# Altium PCB CAN Logger 3e HP3651 PCB.PcbDoc (part 2 of 3)
Units mm, origin at the board's own origin, x right, y up, seen from the top; angles counter-clockwise.
Board outline 56.62 x 82.65 mm, 4 copper layers (Component Side, Signal Layer 2, Signal Layer 1, Solder Side), stack 0.844 mm thick; 116 components, 130 nets, 582 pads, 374 vias.
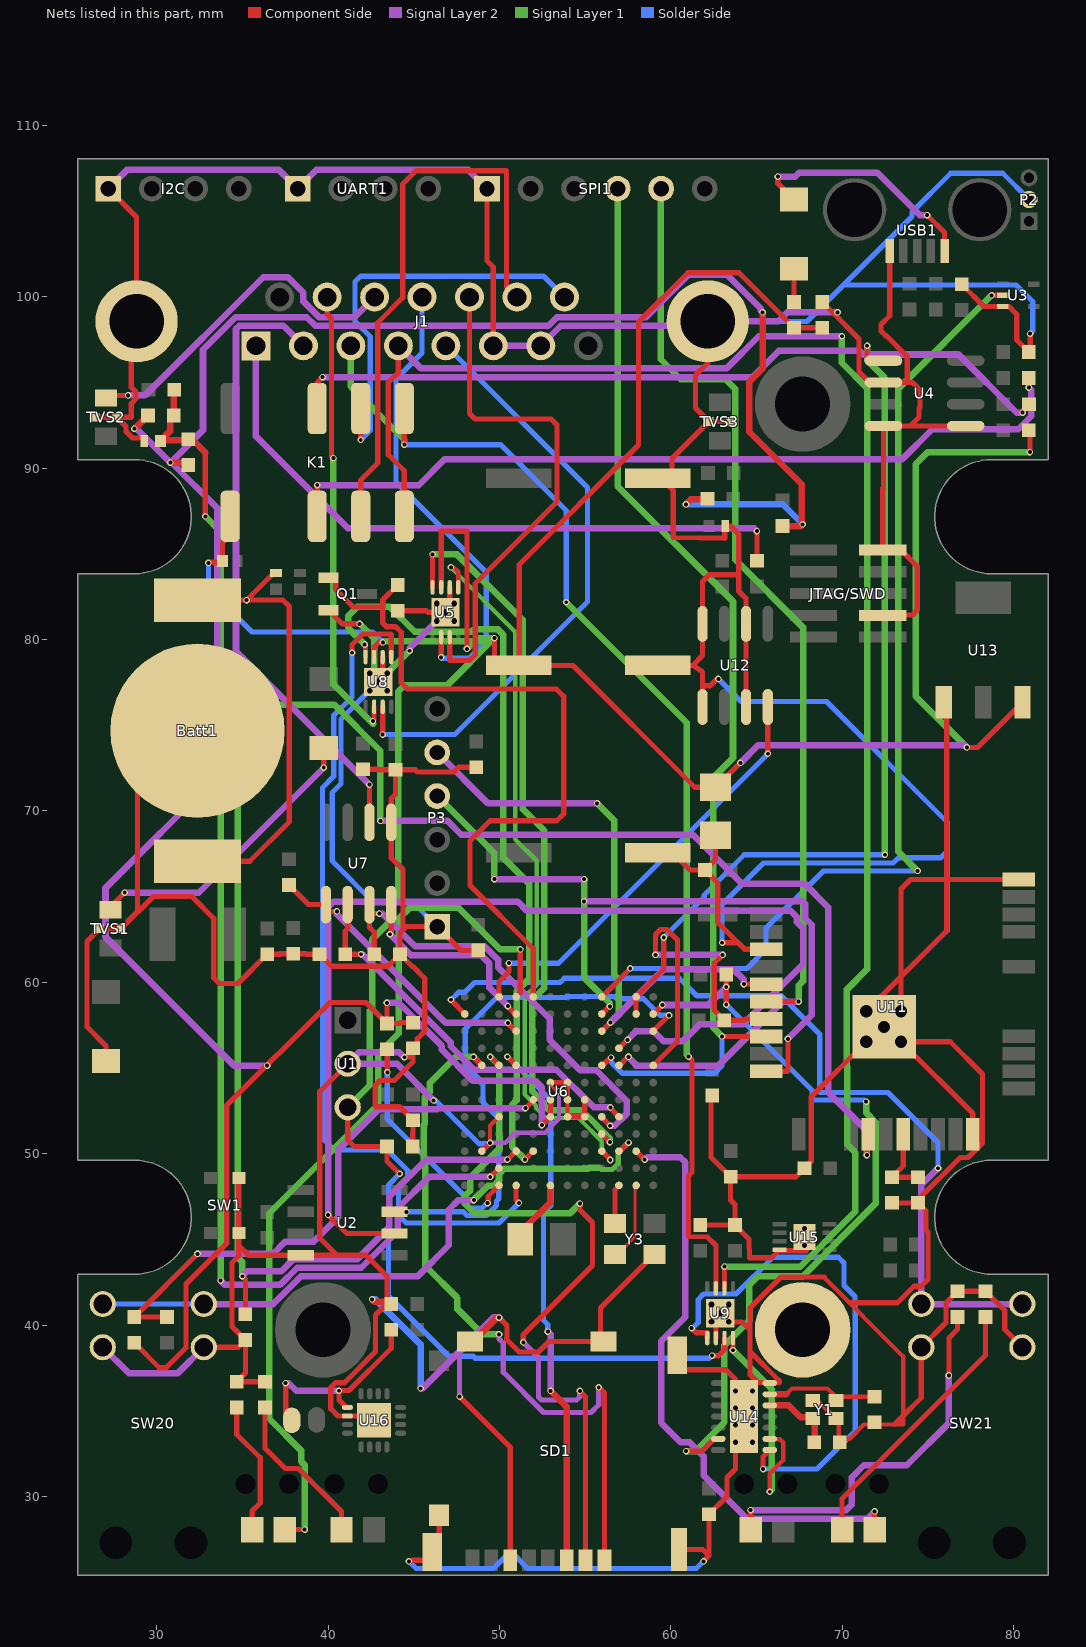
[diagram p4: the nets of this part, all layers, seen from the top]

## Via types
v1: diameter 0.381, hole 0.229, Component Side to Solder Side, 292 vias
v2: diameter 0.508, hole 0.254, Component Side to Solder Side, 66 vias
v3: diameter 0.508, hole 0.33, Component Side to Solder Side, 12 vias
v4: diameter 1.27, hole 0.711, Component Side to Solder Side, 4 vias

## Nets (pads, with @x,y where several pads share a name; then routed paths per layer and width w, separated by ;. In a path a pad name is that pad's centre, name@x,y a point inside that pad or via, vN(x,y) a via of type N, cw(c..) or ccw(c..) an arc to the next point about the centre after c; other vN are vias at no path point) (continued)
5V0: C2.1 C4.1 C6.2 C12.2 D11.2 K1.7 L6.2 R4.1 U1.3 U5.3 U8.3 U9.3 U13.3 | length 205.5
  Component Side w0.305: v1(33.025,84.464) 33.066,84.506 33.772,84.506 D11.2@33.848,84.582 33.848,85.649 34.29,86.091 K1.7@34.29,87.182 ; U1.3@41.148,52.705 41.148,50.8 41.529,50.419 C4.1@43.446,50.419 43.446,49.561 v1(44.18,48.828) ; U8.3@42.688,78.973 42.688,79.543 42.977,79.832 v1(43.205,79.832) ; U5.3@46.601,83.037 46.601,86.316 48.108,86.316 v1(48.108,79.451) ; v1(49.708,80.073) 49.708,78.816 50.038,78.486 C2.1@51.134,78.486 C2.1@51.156,78.486 ; v1(62.408,38.214) 62.784,38.214 63.127,38.557 U9.3@63.127,39.243 ; v1(64.057,72.796) 64.027,72.796 C12.2@62.611,71.38 61.392,71.38 54.286,78.486 C2.1@51.156,78.486 ; C6.2@68.834,98.183 L6.2@67.183,98.183 63.969,101.397 60.985,101.397 58.115,98.527 58.115,91.338 51.156,84.379 C2.1@51.156,78.486 ; v1(77.275,73.698) 77.889,73.698 U13.3@80.518,76.327 ; R4.1@80.887,92.202 80.95,92.139 v1(80.95,90.932)
  Signal Layer 2 w0.381: v1(64.057,72.796) 65.098,73.838 77.135,73.838 v1(77.275,73.698)
  Signal Layer 1 w0.381: U1.3@41.148,52.705 42.43,53.987 42.43,58.323 42.57,58.464 42.57,62.491 43.617,63.537 43.617,64.521 44.094,64.999 44.094,76.962 44.45,77.318 46.939,77.318 49.695,80.073 v1(49.708,80.073) ; v1(43.205,79.832) 43.276,79.903 49.537,79.903 v1(49.708,80.073) ; v1(48.108,79.451) 48.73,80.073 v1(49.708,80.073) ; v1(77.275,73.698) 74.295,76.678 74.295,90.233 74.993,90.932 v1(80.95,90.932)
  Solder Side w0.305: v1(33.025,84.464) 33.025,82.977 35.56,80.441 42.597,80.441 v1(43.205,79.832) ; v1(44.18,48.828) 43.523,48.171 43.523,41.704 47.051,38.176 48.48,38.176 48.594,38.062 62.255,38.062 v1(62.408,38.214)
A6: J1.1 R18.1 | length 38.5
  Component Side w0.305: R18.1@65.024,84.583 v1(65.024,86.316)
  Signal Layer 2 w0.381: J1.1@35.794,97.132 35.794,91.859 41.166,86.487 64.853,86.487 v1(65.024,86.316)
A6_Sense: U6.A3 U12.8 | length 25.1
  Component Side w0.305: U6.A3@49.975,59.149 49.975,60.033 50.553,60.612 v1(50.553,61.112) ; v1(65.659,73.33) U12.8@65.659,76.061
  Solder Side w0.305: v1(50.553,61.112) 53.442,61.112 v1(65.659,73.33)
A7: J1.11 TVS2.1 | length 20.3
  Component Side w0.305: TVS2.1@27.051,94.234 v1(28.334,94.234)
  Signal Layer 2 w0.381: v1(28.334,94.234) 29.32,94.234 36.221,101.135 37.661,101.135 38.564,100.231 38.564,99.713 39.467,98.81 41.556,98.81 J1.11@42.719,99.972
A7_Measured: C17.2 D9.2 R15.2 R24.1 U6.L3 | length 75.2
  Component Side w0.305: R24.1@30.999,92.837 R24.1@30.999,93.064 ; v1(32.842,87.182) 32.842,90.907 ; v1(49.467,48.641) U6.L3@49.975,49.149
  Component Side w0.381: R24.1@30.998,93.066 30.788,92.856 30.788,92.153 30.227,91.592 D9.2@30.227,91.567 30.285,91.624 31.781,91.624 C17.2@31.839,91.682 31.878,91.643 32.106,91.643 32.842,90.907 ; R24.1@30.999,93.064 31.012,93.076 31.012,94.55 R15.2@31.027,94.564
  Signal Layer 2 w0.381: v1(33.731,42.596) 33.985,42.342 37.198,42.342 38.201,43.345 41.937,43.345 44.069,45.477 44.069,46.819 45.891,48.641 v1(49.467,48.641)
  Signal Layer 1 w0.381: v1(32.842,87.182) 33.731,86.293 v1(33.731,42.596)
AGND: C17.1 C21.1 C23.1 C24.1 L5.2 R24.2 R28.2 U6.G6 U6.H6 | length 165.8
  Component Side w0.305: C21.1@28.702,38.976 28.702,38.971 30.158,37.515 30.548,37.515 31.712,38.679 31.712,42.393 34.087,44.767 34.087,52.807 40.107,58.826 42.21,58.826 C23.1@43.44,57.596 ; v1(43.434,58.801) 43.44,58.795 C23.1@43.44,57.596 ; L5.2@44.958,57.646 44.227,57.646 44.171,57.59 C23.1@43.446,57.59 C23.1@43.44,57.596 ; v1(52.476,51.664) 52.49,51.664 U6.H6@52.975,52.149 U6.G6@52.975,53.149
  Component Side w0.381: v1(28.702,92.304) 28.736,92.304 R24.2@29.498,93.066 ; v1(30.808,90.311) 31.709,90.311 C17.1@31.839,90.182 ; v1(60.884,87.884) 61.167,88.167 62.103,88.167 R28.2@62.139,88.202 ; v1(65.354,99.085) 65.354,95.79 64.579,95.015 64.579,92.113 67.64,89.052 v1@67.64,86.665 ; C24.1@66.517,86.614 67.589,86.614 v1@67.64,86.665 ; v1(67.691,86.716) v1@67.64,86.665
  Signal Layer 2 w0.381: v1(28.702,92.304) 28.816,92.304 v1(30.808,90.311) ; v1(36.449,55.14) 34.522,55.14 27.018,62.644 27.018,65.499 33.533,72.014 33.533,87.664 30.885,90.311 v1(30.808,90.311) ; v1(43.434,58.801) 44.122,58.801 46.647,56.275 46.647,56.056 48.436,54.267 52.07,54.267 52.476,53.861 v1(52.476,51.664) ; v1(65.354,99.085) 65.253,99.187 65.253,99.292 63.275,101.27 61.023,101.27 58.563,98.81 53.373,98.81 52.858,98.294 39.264,98.294 38.756,98.802 34.607,98.802 32.707,96.903 32.707,92.211 v1(30.808,90.311)
  Solder Side w0.381: v1(60.884,87.884) 66.523,87.884 v1(67.691,86.716)
AREF: C23.2 U6.M3 | length 13.7
  Component Side w0.305: C23.2@43.446,56.09 43.453,56.083 43.453,54.744 v1(43.46,54.737) ; v1(49.309,47.117) 49.345,47.153 49.345,47.519 U6.M3@49.975,48.149
  Solder Side w0.305: v1(43.46,54.737) 43.46,52.029 48.021,47.468 48.021,47.098 48.294,46.825 48.996,46.825 49.288,47.117 v1(49.309,47.117)
Blue: D6.1 U6.K11 | length 35.7
  Component Side w0.305: U6.K11@57.975,50.149 v1(58.471,49.653) ; D6.1@71.892,28.067 v1(71.892,29.134)
  Signal Layer 2 w0.381: v1(58.471,49.653) 58.611,49.793 60.551,49.793 60.848,49.496 60.848,40.482 59.436,39.07 59.436,34.29 60.573,33.153 61.105,33.153 61.912,32.346 61.912,31.237 64.448,28.702 71.46,28.702 v1(71.892,29.134)
BTTN1: SW21.1 SW21.3 U6.B1 | length 51.8
  Component Side w0.305: v1(47.168,58.979) 47.168,58.956 U6.B1@47.975,58.149
  Signal Layer 2 w0.381: v1(75.586,49.149) 74.612,48.175 SW21.1@74.612,41.224 SW21.3@80.505,41.224
  Solder Side w0.305: v1(47.168,58.979) 47.188,58.979 47.633,59.423 47.988,59.423 48.546,59.981 53.531,59.981 53.787,60.236 60.49,60.236 61.519,59.207 66.456,59.207 68.682,56.981 68.682,53.594 68.707,53.569 72.674,53.569 75.586,50.656 v1(75.586,49.149)
BTTN2: SW20.1 SW20.3 U6.K10 | length 37.1
  Component Side w0.305: U6.K10@56.955,50.074 U6.K10@56.975,50.094 ; U6.K10@56.975,50.149 U6.K10@56.975,50.094 ; v1(57.531,50.65) U6.K10@56.975,50.094
  Signal Layer 2 w0.381: SW20.3@32.753,41.224 36.798,41.224 38.411,42.837 45.225,42.837 47.041,44.653 47.041,46.728 47.608,47.295 v1(48.514,47.295)
  Signal Layer 1 w0.305: 55.975,49.083 56.58,49.083 56.934,49.437 56.934,50.053 v1(57.531,50.65)
  Signal Layer 1 w0.381: v1(48.514,47.295) 48.514,47.32 49.327,48.133 49.677,48.133 49.975,48.431 49.975,48.814 50.285,49.124 52.257,49.124 52.266,49.114 55.18,49.114 55.238,49.172 55.803,49.172
  Solder Side w0.305: SW20.1@26.86,41.224 SW20.3@32.753,41.224
CAN0H: J1.13 U5.7 | length 30.6
  Component Side w0.305: U5.7@47.101,80.137 47.101,78.791 47.126,78.765 48.26,78.765 48.59,79.096 48.59,83.261 53.365,88.036 53.365,92.519 53.023,92.862 48.578,92.862 48.259,93.181 J1.13@48.259,99.972
CAN0L: J1.12 U5.6 | length 27.1
  Component Side w0.305: v1(46.601,78.956) U5.6@46.601,80.137
  Solder Side w0.305: J1.12@45.489,99.972 45.489,96.721 43.967,95.199 43.967,89.179 49.238,83.909 49.238,79.917 48.226,78.905 46.652,78.905 v1(46.601,78.956)
CAN0RX: U5.4 U6.J9 | length 43.7
  Component Side w0.305: U5.4@46.101,83.037 v1(46.101,84.963) ; U6.J9@55.975,51.149 56.439,50.685 v1(56.439,50.673)
  Signal Layer 1 w0.381: v1(46.101,84.963) 47.53,84.963 51.359,81.134 51.359,70.104 52.616,68.847 52.616,59.664 51.918,58.965 51.918,53.644 52.578,52.984 52.578,52.843 52.894,52.527 54.8,52.527 56.439,50.889 v1(56.439,50.673)
CAN0TX: U5.1 U6.K9 | length 42.3
  Component Side w0.254: v1(47.168,84.201) 47.346,84.201 47.601,83.946 U5.1@47.601,83.037
  Component Side w0.305: U6.K9@55.975,50.149 56.464,49.66 v1(56.464,49.632)
  Signal Layer 1 w0.254: v1(47.168,84.201) 50.914,80.454 50.914,68.345 52.172,67.088 52.172,59.848 51.473,59.149 51.473,53.46 52.133,52.8 52.133,52.659 52.71,52.083 54.616,52.083 55.975,50.724 55.975,50.149 56.464,49.66 v1(56.464,49.632)
CAN1H: J1.5 U8.7 | length 35.2
  Component Side w0.305: v1(43.188,74.447) U8.7@43.188,76.073
  Solder Side w0.305: v1(43.188,74.447) 47.396,74.447 55.143,82.194 55.143,88.863 J1.5@46.874,97.132
CAN1L: J1.10 U8.6 | length 27
  Component Side w0.305: J1.10@39.949,99.972 39.949,98.984 40.208,98.725 40.208,90.678 v1(40.31,90.576) ; v1@42.616,75.226 42.688,75.298 U8.6@42.688,76.073
  Signal Layer 1 w0.381: v1(40.31,90.576) 40.31,77.397 v1@42.621,75.086 ; v1(42.621,75.235) v1@42.621,75.086 ; v1@42.631,75.076 v1@42.621,75.086
CAN1RX: U6.K5 U8.4 | length 45.5
  Component Side w0.305: v1(42.137,79.705) 42.188,79.654 U8.4@42.188,78.973 ; v1(51.486,49.657) 51.486,49.66 U6.K5@51.975,50.149
  Signal Layer 1 w0.381: v1(42.137,79.705) 41.173,80.669 41.173,81.358 41.71,81.895 43.607,81.895 45.057,80.444 48.382,80.444 48.519,80.581 49.918,80.581 50.216,80.284 50.216,67.272 51.727,65.761 51.727,60.195 51.003,59.471 51.003,53.119 50.749,52.865 50.749,50.394 v1(51.486,49.657)
CAN1SW: Q1.1 R14.2 U6.A5 | length 44.4
  Component Side w0.305: Q1.1@40.023,83.604 40.298,83.604 40.446,83.456 40.446,82.916 41.472,81.89 43.188,81.89 ; R14.2@44.069,83.173 43.188,82.292 43.188,81.89 ; U6.A5@51.975,59.149 51.975,61.959 48.285,65.648 48.285,68.25 49.454,69.418 53.34,69.418 53.746,69.825 53.746,76.683 53.315,77.114 44.628,77.114 44.272,77.47 44.272,80.416 43.942,80.747 43.404,80.747 43.188,80.962 43.188,81.89
CAN1TX: U6.M4 U8.1 | length 50.7
  Component Side w0.305: v1(41.402,79.223) 41.402,79.692 42.024,80.315 43.663,80.315 43.688,80.289 U8.1@43.688,78.973 ; U6.M4@50.975,48.149 50.975,47.309 51.134,47.15 v1(51.134,47.13)
  Solder Side w0.305: v1(41.402,79.223) 41.402,76.631 40.329,75.558 40.329,72.005 39.675,71.351 39.675,50.902 40.361,50.216 43.456,50.216 44.65,49.022 44.65,48.633 44.107,48.091 44.107,46.414 44.56,45.961 49.966,45.961 v1(51.134,47.13)
CAN2H: J1.3 K1.3 U9.7 | length 70
  Component Side w0.305: v1(44.45,91.364) K1.3@44.45,93.472 ; v1(61.036,55.664) 61.242,55.458 61.242,48.912 61.036,48.706 61.036,45.161 62.128,45.136 62.627,44.637 U9.7@62.627,42.143
  Signal Layer 1 w0.381: J1.3@41.334,97.132 41.334,94.759 44.45,91.643 v1(44.45,91.364) ; v1(53.899,82.169) 60.935,75.133 60.935,55.766 v1(61.036,55.664)
  Solder Side w0.305: v1(44.45,91.364) 50.063,91.364 53.899,87.528 v1(53.899,82.169)
CAN2H/J1708+: J1.15 K1.1 | length 24.5
  Component Side w0.305: v1(41.91,91.643) K1.1@41.91,93.472
  Solder Side w0.305: v1(41.91,91.643) 42.469,92.202 42.469,97.663 41.58,98.552 41.58,100.863 41.91,101.194 52.577,101.194 J1.15@53.799,99.972
CAN2L: J1.4 K1.6 U9.6 | length 100.4
  Component Side w0.305: J1.4@44.104,97.132 44.104,95.58 43.51,94.986 43.51,90.78 44.45,89.84 K1.6@44.45,87.182 ; U9.6@63.127,42.143 v1(63.127,43.409)
  Signal Layer 2 w0.381: J1.4@44.104,97.132 45.402,95.834 63.274,95.834 65.129,97.688 v1(69.977,97.688)
  Signal Layer 1 w0.381: v1(63.127,43.409) 67.549,43.409 70.764,46.624 70.764,50.063 70.282,50.546 70.282,55.056 70.271,55.067 70.271,59.578 71.45,60.757 71.45,94.671 69.977,96.144 v1(69.977,97.688)
CAN2L/J1708-: J1.14 K1.4 | length 34.4
  Component Side w0.305: K1.4@41.91,87.182 41.91,89.306 42.901,90.297 42.901,98.476 44.365,99.94 44.365,106.569 45.136,107.34 50.394,107.34 50.419,107.315 50.419,100.582 J1.14@51.029,99.972
CAN2RX: U9.4 U14.2 | length 14
  Component Side w0.254: v1(65.77,30.277) 65.77,31.331 66.548,32.109 66.548,33.163 66.366,33.345 65.788,33.345 U14.2@65.77,33.363
  Component Side w0.305: v1(63.627,38.532) U9.4@63.627,39.243
  Signal Layer 1 w0.381: v1(63.627,38.532) 65.889,36.27 65.889,30.396 v1(65.77,30.277)
CAN2TX: U9.1 U14.1 | length 30.5
  Component Side w0.305: v1(61.214,39.827) 61.493,39.548 62.127,39.548 U9.1@62.127,39.243 ; v1(65.381,31.599) 65.38,31.6 65.38,32.323 U14.1@65.77,32.713
  Solder Side w0.305: v1(61.214,39.827) 61.277,39.827 61.595,40.145 61.595,41.491 61.912,41.808 63.805,41.808 65.951,43.955 69.765,43.955 70.104,43.616 70.104,42.316 70.748,41.672 70.748,41.015 70.764,40.999 70.764,33.833 68.531,31.599 v1(65.381,31.599)
CHIP_EN: R17.1 U6.K4 U11.22 | length 113.9
  Component Side w0.305: v1(35.001,42.85) 35.179,42.672 R17.1@35.179,40.628 ; v1(50.47,49.657) 50.483,49.657 U6.K4@50.975,50.149 ; v1(71.439,49.911) 71.439,51.045 U11.22@71.522,51.128
  Signal Layer 2 w0.381: v1(35.001,42.85) 35.294,43.143 37.28,43.143 37.991,43.853 41.727,43.853 43.561,45.687 43.561,47.491 45.727,49.657 v1(50.47,49.657) ; v1(43.053,69.418) 46.965,69.418 47.777,68.605 61.29,68.605 64.135,65.761 67.793,65.761 69.19,64.364 69.19,53.571 71.439,51.321 v1(71.439,49.911)
  Signal Layer 1 w0.381: v1(35.001,42.85) 35.001,43.688 34.747,43.942 34.747,75.73 35.217,76.2 40.361,76.2 43.053,73.508 v1(43.053,69.418)
CMD: SD1.3 U6.E4 | length 31.9
  Component Side w0.305: v1(50.47,55.654) U6.E4@50.975,55.149 ; v1@52.817,39.609 v1(52.832,39.624)
  Component Side w0.381: v1(52.984,36.163) 53.926,35.222 SD1.3@53.926,26.284
  Signal Layer 2 w0.381: v1(52.832,39.624) 52.984,39.472 v1(52.984,36.163)
  Solder Side w0.305: v1(50.47,55.654) 52.997,53.127 52.997,46.964 52.578,46.545 52.578,40.28 52.817,40.04 52.817,39.639 v1(52.832,39.624)
CS1: R33.1 U6.E12 U11.16 | length 21.4
  Component Side w0.305: U6.E12@58.975,55.149 60.389,56.562 60.389,62.475 59.783,63.081 59.394,63.081 59.106,62.793 v1(59.106,61.595) ; v1(63.017,61.595) 62.535,61.112 62.535,58.373 R33.1@63.123,57.785 64.287,57.785 64.358,57.856 U11.16@65.558,57.856
  Signal Layer 2 w0.381: v1(59.106,61.595) v1(63.017,61.595)
CS_CAN: R32.1 U6.B12 U14.13 | length 46.7
  Component Side w0.305: U6.B12@58.975,58.149 58.981,58.149 59.506,58.674 v1(59.512,58.674) ; v1(60.895,32.645) 61.81,32.645 62.527,33.363 U14.13@62.77,33.363 ; v1(63.234,58.699) v1(63.234,59.735) R32.1@63.234,60.452
  Signal Layer 2 w0.381: v1(59.512,58.674) 62.173,58.674 v1(63.234,59.735)
  Signal Layer 1 w0.381: v1(60.895,32.645) 61.445,32.645 63.119,34.319 63.119,38.811 64.567,40.259 64.567,42.329 65.087,42.85 67.708,42.85 71.947,47.089 71.947,51.834 71.387,52.394 v1(71.387,53.039)
  Solder Side w0.305: v1(63.234,58.699) 68.25,53.684 68.25,53.162 68.275,53.137 71.289,53.137 v1(71.387,53.039)
D25: 
DATA2: SD1.1 U6.E2 | length 41.3
  Component Side w0.305: v1(55.795,36.364) 55.802,36.364 56.126,36.04 SD1.1@56.126,26.284
  Component Side w0.381: v1(48.489,55.651) 48.975,55.165 U6.E2@48.975,55.149
  Signal Layer 2 w0.305: v1(49.975,39.458) 49.975,39.19 50.223,38.942 50.223,37.254 52.57,34.907 55.349,34.907 55.795,35.353 v1(55.795,36.364)
  Signal Layer 1 w0.381: v1(48.489,55.651) 47.47,55.651 45.923,54.104 45.923,53.592 45.652,53.32 45.652,51.745 45.58,51.673 45.58,49.475 45.669,49.386 45.669,43.457 47.549,41.577 47.549,40.935 49.026,39.458 v1(49.975,39.458)
DATA3: SD1.2 U6.E3 | length 44.1
  Component Side w0.305: v1(49.467,55.651) 49.473,55.651 U6.E3@49.975,55.149 ; v1(51.395,38.986) 51.395,39.445 55.423,43.472 55.423,45.987 54.695,46.715 v1(54.695,47.092) ; v1(54.695,36.163) 54.695,36.142 55.026,35.812 SD1.2@55.026,26.284
  Signal Layer 2 w0.305: v1(51.395,38.986) 52.28,38.1 52.28,35.808 52.459,35.629 54.507,35.629 54.681,35.803 54.681,36.148 v1(54.695,36.163)
  Signal Layer 1 w0.381: v1(49.467,55.651) 49.987,55.131 49.987,50.977 50.004,50.96 50.004,50.309 48.285,48.59 48.285,47.835 47.981,47.531 47.981,47.084 48.528,46.537 54.14,46.537 v1(54.695,47.092)
"Debug RX": P3.4 U6.B9 U11.19 | length 44.9
  Component Side w0.305: U6.B9@55.975,58.149 56.424,58.598 v1(56.445,58.598) ; U11.19@65.558,54.808 66.802,54.808 66.827,54.833 v1(66.827,56.693)
  Signal Layer 2 w0.381: v1(49.708,66.015) v1(54.94,66.015) ; v1(54.94,64.719) 67.691,64.719 67.843,64.567 67.843,63.735 68.22,63.358 68.22,58.085 v1(66.827,56.693)
  Signal Layer 1 w0.381: P3.4@46.367,70.866 49.708,67.525 v1(49.708,66.015) ; v1(54.94,66.015) v1(54.94,64.719) 54.94,60.274 56.445,58.77 v1(56.445,58.598)
"Debug TX": P3.5 U6.C9 U11.14 | length 35.7
  Component Side w0.305: U6.C9@55.975,57.149 v1(56.475,57.649) ; v1(64.262,59.893) 65.553,59.893 U11.14@65.558,59.888
  Signal Layer 2 w0.381: P3.5@46.367,73.406 49.339,70.434 v1(55.702,70.434) ; v1(56.475,57.649) 59.577,60.751 63.655,60.751 64.262,60.143 v1(64.262,59.893)
  Signal Layer 1 w0.381: v1(55.702,70.434) 56.694,69.443 56.694,60.418 56.972,60.14 56.972,58.146 v1(56.475,57.649)
EOSC16: U6.M11 Y3.1 | length 4.5
  Component Side w0.178: Y3.1@56.955,44.196 57.922,45.163 57.922,48.202 U6.M11@57.975,48.149
EXTAL32: U6.M6 X1.2 | length 4.1
  Component Side w0.381: X1.2@50.713,44.577 50.91,44.774 X1.2@51.208,44.774 ; X1.2@51.134,45.499 51.304,45.499 52.975,47.17 U6.M6@52.975,48.149
GND: Batt1.2 C1.1 C2.2 C3.2 C4.2 C5.1 C6.1 C7.1 C8.1 C9.1 C10.2 C11.1 C12.1 C13.1 C14.1 C15.1 C16.1 C18.1 C19.1 C20.1 C22.1 C25.1 C28.2 D9.1 D10.1 I2C.1 J1.6 J1.7 J1.16 J1.17 JTAG/SWD.3 JTAG/SWD.9 L5.1 P2.2 P3.1 pad.0@67.691,39.726 Q1.2 R2.2 R3.2 R7.2 R8.2 R9.2 R11.2 R12.2 R13.2 R14.1 R17.2 R19.2 R23.2 R27.2 SD1.6 SD1.P1 SD1.P2 SD1.P3 SD1.P4 SD1.P5 SD1.SW SPI1.1 SW1.3 SW1.4 SW20.2 SW20.4 SW21.2 SW21.4 TVS1.3 TVS2.3 TVS3.3 U1.2 U2.8 U3.3 U4.2 U4.4 U4.5 U5.0 U5.2 U6.F6 U6.F7 U6.G7 U6.G8 U6.H3 U6.H7 U6.H8 U6.K2 U6.M10 U7.5 U8.0 U8.2 U9.0 U9.2 U11.9 U11.12 U11.28 U11.29 U12.2 U12.4 U12.5 U12.7 U13.1 U14. U14.7 U15.4 U15.9 U15.9_1 U15.9_2 U16.2 U16.17 UART1.1 USB1.4 Y1.2 Y1.4 Y3.2 Y3.4 Z1.1 | length 717.9
  Component Side w0.203: U6.F6@52.975,54.149 52.85,54.149 53.354,53.645 v1(53.474,53.645)
  Component Side w0.254: v1(49.454,50.628) 49.454,51.628 U6.H3@49.975,52.149 ; U6.H7@53.975,52.149 U6.G7@53.975,53.149 ; 56.744,47.918 U6.M10@56.975,48.149 ; SD1.P3@60.215,37.866 SD1.P3@60.215,38.521 ; 64.643,38.463 64.643,40.988 66.428,42.774 68.954,42.774 73.552,38.175 73.552,34.702 73.552,34.197 73.047,34.197 71.26,34.197 70.435,33.372 69.801,33.372 69.801,34.716 69.44,34.716 Y1.2@68.465,35.691 ; 66.322,36.613 66.322,36.652 ; 66.322,36.748 66.322,36.784
  Component Side w0.305: TVS2.3@26.416,92.964 TVS2.3@27.686,92.964 ; Z1.1@27.051,55.397 27.051,56.286 25.933,57.404 25.933,62.382 TVS1.3@26.67,63.119 TVS1.3@27.94,63.119 29.82,64.999 32.067,64.999 33.337,63.729 33.337,60.251 33.655,59.934 34.752,59.934 C10.2@36.449,61.631 37.186,61.631 37.215,61.66 C1.1@37.973,61.66 38.71,61.66 38.733,61.636 R9.2@39.509,61.636 40.21,60.935 43.5,60.935 R8.2@44.196,61.63 ; I2C.1@27.178,106.299 28.829,104.648 J1.16@28.829,98.552 28.524,98.247 28.524,94.704 28.528,94.704 28.804,94.429 28.804,94.039 28.528,93.764 28.524,93.764 28.524,92.964 TVS2.3@27.686,92.964 ; 28.346,63.602 28.88,64.135 28.88,71.171 Batt1.2@32.385,74.676 ; D9.1@29.277,91.567 29.277,91.674 29.205,91.746 28.595,91.746 28.219,92.122 28.219,92.431 TVS2.3@27.686,92.964 ; SW20.4@32.753,38.71 34.761,38.71 R17.2@35.179,39.128 ; SW1.4@34.797,48.26 SW1.3@34.797,45.381 34.797,44.653 ; R3.2@36.322,36.691 R2.2@34.671,36.691 35.179,37.199 R17.2@35.179,39.128 ; Q1.2@40.023,81.704 40.816,80.911 v1(41.846,80.911) ; U1.2@41.148,55.245 39.522,53.619 39.522,45.085 40.538,44.069 ; C16.1@42.037,72.431 42.951,72.431 42.981,72.402 R12.2@43.942,72.402 ; U16.17@42.684,34.443 42.033,34.443 41.783,34.693 U16.2@41.134,34.693 40.589,34.693 40.166,35.116 40.166,36.364 40.441,36.639 40.961,36.639 42.774,38.453 42.774,40.589 C25.1@43.459,41.275 ; U8.2@43.188,78.973 43.188,78.289 v3(43.446,78.031) ; C25.1@43.459,41.072 C25.1@43.459,41.275 ; R14.1@44.069,81.673 45.749,81.673 45.835,81.587 U5.0@46.851,81.587 ; v1(44.45,55.626) 44.465,55.641 44.858,55.641 44.958,55.74 ; v1(44.721,26.213) 44.735,26.227 44.875,26.227 44.931,26.284 45.658,26.284 46.081,26.707 SD1.P2@46.081,26.764 46.486,27.169 SD1.SW@46.486,28.914 ; C4.2@44.946,50.419 44.946,51.181 44.958,51.193 C20.1@44.958,51.955 44.171,52.742 42.799,52.742 42.762,52.78 42.762,53.988 43.04,54.267 43.866,54.267 44.958,55.359 44.958,55.74 ; U5.2@47.101,83.037 47.101,82.353 v3(47.359,82.095) ; v1(47.676,35.832) 50.626,32.882 SD1.6@50.626,26.284 ; R11.2@48.641,72.541 47.624,72.541 47.346,72.263 45.224,72.263 45.085,72.402 R12.2@43.942,72.402 ; C13.1@48.768,61.861 47.752,61.861 P3.1@46.367,63.246 44.577,63.246 44.374,63.043 ; U6.K2@48.975,50.149 v1(49.454,50.628) ; SPI1.1@49.276,106.299 49.276,102.095 49.644,101.727 J1.6@49.644,97.132 ; v1(49.975,40.438) 50.445,39.968 50.445,39.263 50.434,39.252 50.434,39.145 51.152,38.427 52.273,38.427 52.886,39.039 SD1.P4@56.066,39.039 55.891,39.214 55.891,40.997 Y3.2@58.579,43.685 ; U6.F6@52.975,54.149 U6.F7@53.975,54.149 U6.G7@53.975,53.149 ; U6.H7@53.975,52.149 U6.H8@54.975,52.149 U6.G8@54.975,53.149 ; Y3.4@56.744,45.92 56.744,47.918 ; C28.2@59.234,67.564 60.096,67.564 61.112,66.548 R27.2@61.988,66.548 ; C2.2@59.234,78.486 61.277,78.486 ; C3.2@59.234,89.408 C3.2@59.436,89.408 ; 60.147,88.622 60.147,85.952 63.143,85.903 D10.1@63.168,86.614 63.5,86.614 63.957,86.157 63.957,83.769 ; 60.147,88.697 60.071,88.773 ; SD1.P3@60.215,38.521 SD1.P3@60.34,38.647 ; SD1.P3@60.325,37.4 63.2,37.4 63.77,36.83 U14.@63.77,36.163 ; SD1.P1@60.471,26.914 61.864,26.914 62.23,26.548 ; SD1.P3@60.604,38.911 SD1.P3@60.348,38.654 ; C3.2@60.858,89.408 C3.2@60.071,89.408 ; R13.2@61.722,45.835 62.627,45.835 C9.1@63.738,45.835 ; U12.5@61.849,76.061 61.849,77.267 ; v1(61.912,26.213) 61.912,26.231 62.23,26.548 ; J1.17@62.149,98.552 62.149,96.134 61.443,95.428 61.443,93.497 TVS3.3@62.23,92.71 ; U9.0@62.252,40.302 v3(62.369,40.185) 62.627,39.927 U9.2@62.627,39.243 ; 62.281,77.318 61.849,77.292 ; C7.1@62.423,53.399 62.351,53.327 62.351,49.79 C22.1@63.488,48.653 ; C12.1@62.611,68.58 62.611,67.171 R27.2@61.988,66.548 ; v1(62.778,77.699) 62.69,77.699 62.282,77.291 61.849,77.267 ; v1(62.992,62.306) 63.927,62.306 ; v3(63.385,40.185) 64.158,40.185 64.618,39.726 ; TVS3.3@63.5,92.71 TVS3.3@62.23,92.71 ; U14.@63.77,33.163 63.77,31.598 63.271,31.099 63.271,30.009 C8.1@62.23,28.968 62.23,26.548 ; U14.@63.77,35.163 63.754,35.163 64.254,34.663 U14.@64.27,34.663 ; U12.7@64.389,76.061 U12.2@64.389,80.911 64.389,82.398 63.957,82.829 63.957,83.769 ; 66.322,36.652 65.087,36.652 64.618,37.122 64.618,38.453 ; 66.322,36.748 64.618,38.453 ; 67.903,44.335 66.297,44.335 65.892,43.93 64.592,43.93 64.567,45.006 C9.1@63.738,45.835 ; C6.1@68.834,99.683 69.432,99.085 ; 68.964,42.799 66.418,42.799 64.618,40.999 64.618,39.726 ; v1(69.723,99.085) 69.432,99.085 ; 70.463,41.3 73.216,41.3 74.181,42.266 74.612,42.266 75.006,42.659 75.006,45.415 74.879,45.542 74.879,46.672 C11.1@74.422,47.129 ; v4(71.399,58.305) 73.431,60.337 ; JTAG/SWD.3@72.366,81.407 72.391,81.432 74.092,81.432 74.371,81.712 74.371,84.267 73.421,85.217 JTAG/SWD.9@72.366,85.217 72.366,88.798 72.403,88.835 U4.4@72.403,92.456 73.977,92.456 ; USB1.4@72.771,102.667 72.771,98.886 72.263,98.378 72.263,97.988 72.538,97.713 72.59,97.713 73.787,96.516 73.787,95.021 73.762,94.996 ; C5.1@72.898,47.129 C11.1@74.422,47.129 ; 73.047,34.197 73.552,34.702 74.612,35.763 SW21.2@74.612,38.71 76.048,40.145 76.048,41.292 R19.2@76.729,41.974 R23.2@78.359,41.974 79.477,40.857 79.477,39.738 SW21.4@80.505,38.71 ; v4(73.431,58.305) 73.431,60.337 ; U13.1@75.918,76.327 75.918,75.844 76.098,75.844 76.098,65.99 ; C19.1@76.976,100.722 78.272,99.426 U3.3@79.364,99.426 79.72,99.426 80.175,98.971 80.175,97.486 R7.2@80.887,96.774 80.962,96.849 v1(80.962,97.839) ; U4.5@77.203,92.456 73.977,92.456 ; U11.28@77.618,51.128 77.618,52.34 v4(73.431,56.527) ; U11.9@80.288,65.99 76.098,65.99 ; 34.797,44.653 34.797,44.043 34.392,43.637 34.392,39.915 R17.2@35.179,39.128 ; 34.797,44.653 35.381,44.069 U2.8@38.408,44.069 40.538,44.069 ; 40.538,44.069 42.227,44.069 43.459,42.837 43.459,41.35 C25.1@43.459,41.275 ; R12.2@43.942,72.402 43.942,70.968 43.688,70.714 U7.5@43.688,69.329 43.688,67.259 44.374,66.573 44.374,63.043 ; R8.2@44.196,61.63 44.912,60.914 44.96,60.914 45.637,60.237 45.637,57.13 45.206,56.698 45.206,56.394 L5.1@44.958,56.146 44.958,55.74 ; R8.2@44.196,61.63 44.196,62.865 44.374,63.043 ; C3.2@59.436,89.408 C3.2@60.071,89.408 ; C3.2@59.436,89.408 60.071,88.773 ; 60.071,88.773 C3.2@60.071,89.408 ; C3.2@60.071,89.408 60.071,90.551 TVS3.3@62.23,92.71 ; SD1.P3@60.34,38.647 SD1.P3@60.348,38.654 ; SD1.P3@60.34,38.647 60.34,38.506 SD1.P3@60.348,38.654 ; 61.277,78.486 61.849,78.105 61.849,77.292 ; 61.277,78.486 61.849,79.057 U12.4@61.849,80.911 61.849,83.388 62.23,83.769 63.957,83.769 ; 61.849,77.267 61.849,77.292 ; R27.2@61.988,66.548 62.738,65.798 62.738,63.495 63.927,62.306 ; C22.1@63.488,48.653 63.488,47.295 63.738,47.045 C9.1@63.738,45.835 ; C22.1@63.488,48.653 67.302,48.653 C18.1@67.797,49.149 68.186,49.538 68.186,53.314 v4(71.399,56.527) v4(73.431,56.527) ; 63.927,62.306 64.313,61.92 U11.12@65.558,61.92 64.313,61.945 63.952,62.306 63.927,62.306 ; 64.618,38.453 64.618,39.726 ; 69.432,99.085 70.98,97.537 70.98,95.619 71.603,94.996 U4.2@72.403,94.996 73.762,94.996 ; v4(73.431,56.527) 76.302,56.527 78.181,54.648 78.181,50.622 77.343,49.784 76.886,49.784 74.422,47.32 C11.1@74.422,47.129 ; 73.431,60.337 73.431,65.444 73.977,65.99 76.098,65.99 ; 73.431,60.337 76.098,63.004 76.098,65.99 ; 73.762,94.996 74.092,94.996 74.536,94.551 74.536,93.531 74.486,93.481 74.486,92.964 73.977,92.456
  Component Side w0.381: v1(42.568,41.498) 42.716,41.35 43.459,41.35 43.563,41.35 C25.1@43.688,41.226 ; SD1.P5@48.286,39.039 48.461,39.039 49.86,40.438 v1(49.975,40.438)
  Signal Layer 2 w0.254: v1(49.454,50.628) 50.336,50.628 50.927,51.219 52.661,51.219 53.474,52.033 v1(53.474,53.645)
  Signal Layer 2 w0.305: v1(47.676,35.832) 47.676,38.463
  Signal Layer 2 w0.381: SW20.2@26.86,38.71 28.371,37.199 31.243,37.199 SW20.4@32.753,38.71 ; I2C.1@27.178,106.299 28.27,107.391 37.135,107.391 UART1.1@38.227,106.299 39.319,107.391 48.184,107.391 SPI1.1@49.276,106.299 ; v3(42.43,77.015) v3(43.446,77.015) ; v3(42.43,78.031) U8.0@42.938,78.031 ; U8.0@42.938,77.523 U8.0@42.938,78.031 ; v3(43.446,78.031) U8.0@42.938,78.031 ; v1(44.45,55.626) 44.437,55.626 44.158,55.905 41.808,55.905 U1.2@41.148,55.245 44.024,55.245 v1(46.16,53.11) ; v1(44.755,79.34) 44.755,79.491 v3(46.343,81.079) v3(47.359,81.079) ; v1(45.401,36.304) 45.517,36.304 47.676,38.463 49.655,40.442 49.971,40.442 v1(49.975,40.438) ; v3(46.343,82.095) 46.366,82.118 47.336,82.118 v3(47.359,82.095) 47.359,81.839 47.103,81.839 U5.0@46.851,81.587 ; J1.6@49.644,97.132 J1.7@52.414,97.132 53.584,98.302 61.899,98.302 J1.17@62.149,98.552 66.268,98.552 66.801,99.085 v1(69.723,99.085) ; v3(62.369,40.185) v3(63.385,40.185) ; v3(62.369,41.201) U9.0@62.877,41.201 ; U9.0@62.877,40.693 U9.0@62.877,41.201 ; v3(63.385,41.201) U9.0@62.877,41.201
  Signal Layer 1 w0.381: v1(41.846,80.911) 42.697,80.06 42.697,78.298 v3(42.43,78.031) ; v3(43.446,77.015) v3(43.446,78.031) v1(44.755,79.34) ; v3(47.359,81.079) v3(47.359,82.095) ; v3(63.385,40.185) v3(63.385,41.201)
  Solder Side w0.305: v3(42.43,77.015) 40.761,75.346 40.761,71.577 40.246,71.063 40.246,67.069 42.672,64.643 44.97,64.643 P3.1@46.367,63.246 ; v1(44.721,26.213) 44.741,26.213 45.148,25.806 49.657,25.806 50.594,26.743 50.724,26.743 51.134,26.333 51.134,26.311 51.638,25.806 61.485,25.806 61.892,26.213 v1(61.912,26.213) ; v1(46.16,53.11) 46.29,53.11 48.817,50.583 v1@49.409,50.583 ; J1.17@62.149,98.552 67.945,98.552 70.079,100.686 ; v1(62.778,77.699) 64.098,76.378 69.088,76.378 76.098,69.367 76.098,67.627 ; v1(62.992,62.306) 62.992,64.541 65.405,66.954 72.974,66.954 73.279,67.259 75.73,67.259 76.098,67.627 ; v4(71.399,58.305) 76.098,63.004 76.098,67.627 ; P2.2@80.899,105.664 79.367,107.196 76.325,107.196 74.066,104.937 74.066,104.673 70.079,100.686 ; v1(80.962,97.839) 81.115,97.992 81.115,99.712 80.141,100.686 70.079,100.686
  Solder Side w0.381: v1(42.568,41.498) 42.774,41.498 45.401,38.871 v1(45.401,36.304)
Green: D1.1 U6.A4 | length 52
  Component Side w0.305: D1.1@37.475,28.067 v1(38.633,28.067) ; U6.A4@50.975,59.149 51.219,59.393 v1(51.219,61.912)
  Signal Layer 1 w0.381: v1(38.633,28.067) 38.633,31.844 38.43,32.048 38.43,32.683 36.576,34.537 36.576,46.526 42.938,52.888 42.938,55.836 44.133,57.031 44.133,63.716 44.755,64.338 47.625,64.338 50.051,61.912 v1(51.219,61.912)
"J1708 RX": U4.1 U6.A11 U6.B11 | length 51.9
  Component Side w0.305: U6.B11@57.975,58.149 U6.A11@57.975,59.149 59.588,60.762 v1(59.588,62.611) ; v1(71.45,97.132) 71.45,96.444 71.628,96.266 U4.1@72.403,96.266
  Signal Layer 1 w0.381: v1(71.45,97.132) 71.45,96.291 72.492,95.25 v1(72.492,67.437)
  Solder Side w0.305: v1(59.588,62.611) 61.945,64.968 61.945,65.095 64.287,67.437 v1(72.492,67.437)
"J1708 TX": U3.2 U6.A9 | length 59.1
  Component Side w0.305: U6.A9@55.975,59.149 v1(57.634,60.808) ; v1(78.715,100.076) U3.2@79.364,100.076
  Signal Layer 1 w0.381: v1(74.397,66.497) 73.279,67.615 73.279,94.64 v1(78.715,100.076)
  Solder Side w0.305: v1(57.634,60.808) 64.44,60.808 65.557,61.925 65.557,63.157 68.897,66.497 v1(74.397,66.497)
J1708+: K1.2 R5.2 | length 45.6
  Component Side w0.305: K1.2@39.37,93.472 39.37,94.983 v1(39.688,95.301) ; v1(80.518,93.231) 80.518,93.345 R5.2@80.899,93.726
  Signal Layer 2 w0.381: v1(39.688,95.301) 64.77,95.301 66.307,96.837 71.026,96.837 71.24,96.624 76.782,96.624 80.175,93.231 v1(80.518,93.231)
J1708-: K1.5 R6.2 | length 47.4
  Component Side w0.305: K1.5@39.37,87.182 v1(39.37,89.002) ; v1(80.885,94.698) v1(80.885,94.698) R6.2@80.887,95.25
  Signal Layer 2 w0.381: v1(39.37,89.002) 45.288,89.002 46.812,90.526 73.508,90.526 75.248,92.266 80.271,92.266 81.026,93.02 81.026,94.557 v1(80.885,94.698)
LIN: J1.2 U7.6 | length 36.5
  Component Side w0.305: U7.6@42.418,69.329 v1(42.418,71.526)
  Signal Layer 2 w0.381: J1.2@38.564,97.132 37.402,98.294 34.817,98.294 34.631,98.108 34.631,79.313 v1(42.418,71.526)
"LIN1 RX": R10.1 U6.C4 U7.1 | length 17.1
  Component Side w0.305: R10.1@37.719,65.671 38.861,64.529 U7.1@39.878,64.529 39.878,64.135 v1(40.513,64.135) ; v1(50.495,57.633) 50.495,57.589 50.936,57.149 U6.C4@50.975,57.149
  Signal Layer 2 w0.381: v1(40.513,64.135) 40.513,63.978 46.858,57.633 v1(50.495,57.633)
"LIN1 TX": U6.B4 U7.4 | length 11.9
  Component Side w0.305: v1(43.617,62.801) 43.688,62.873 U7.4@43.688,64.529 ; U6.B4@50.975,58.149 50.916,58.149 v1@50.492,58.572 ; v1@50.492,58.572 v1@50.495,58.575 ; v1@50.492,58.572 v1@50.495,58.575 ; v1@50.495,58.575 v1(50.495,58.607) v1@50.495,58.575
  Signal Layer 2 w0.381: v1(43.617,62.801) 44.829,61.589 48.926,61.589 49.416,61.1 49.416,59.686 v1(50.495,58.607)
"LIN !WAKE": R8.1 U6.H9 U7.3 | length 26.2
  Component Side w0.305: U7.3@42.418,64.529 U7.3@42.418,64.008 ; R8.1@42.696,61.63 42.696,62.916 42.418,63.194 U7.3@42.418,64.008 ; v1(43.002,64.008) U7.3@42.418,64.008 ; U6.H9@55.975,52.149 55.975,52.11 v1(56.457,51.628)
  Signal Layer 2 w0.381: v1(43.002,64.008) 43.167,64.008 45.078,62.097 49.137,62.097 49.924,61.31 49.924,60.878 52.934,57.868 52.934,56.635 54.704,54.865 55.645,54.865 57.415,53.094 57.415,52.316 56.727,51.628 v1(56.457,51.628)
"LIN CS": R9.1 U6.H10 U7.2 | length 23
  Component Side w0.305: U7.2@41.148,64.529 41.148,63.131 41.009,62.992 R9.1@41.009,61.636 v1(41.935,61.636) ; v1(56.475,52.705) 56.475,52.649 U6.H10@56.975,52.149
  Signal Layer 2 w0.381: v1(41.935,61.636) 42.005,61.636 47.155,56.486 47.155,56.266 48.519,54.902 53.315,54.902 55.512,52.705 v1(56.475,52.705)
M0: U2.2 U6.D10 | length 66.3
  Component Side w0.305: v1(40.005,46.431) 41.097,45.339 U2.2@43.888,45.339 ; U6.D10@56.975,56.149 57.468,56.642 v1(57.48,56.642)
  Signal Layer 2 w0.381: v1(40.005,46.431) 40.005,64.389 40.322,64.706 51.067,64.706 51.613,64.16 66.992,64.16 67.335,63.817 67.335,63.524 67.712,63.148 67.712,61.057 64.211,57.556 61.697,57.556 60.706,56.566 59.554,56.566 58.97,57.15 57.988,57.15 v1(57.48,56.642)
M1: U2.3 U6.C12 | length 31.9
  Component Side w0.305: U2.3@43.888,46.609 v1(44.577,46.609) ; U6.C12@58.975,57.149 59.881,58.055 59.884,58.055 v1(59.893,58.064)
  Solder Side w0.305: v1(44.577,46.609) 47.899,46.609 48.115,46.393 49.249,46.393 49.825,46.969 49.825,47.239 49.966,47.38 49.966,52.06 49.037,52.988 49.037,54.137 48.005,55.169 48.005,57.277 49.845,59.117 53.889,59.117 53.941,59.169 56.71,59.169 56.837,59.042 58.407,59.042 59.371,58.079 59.879,58.079 v1(59.893,58.064)
MISO1: SPI1.4 U6.E9 U11.17 | length 65.1
  Component Side w0.305: U6.E9@55.975,55.149 56.014,55.149 56.451,55.586 56.5,55.586 v1(56.515,55.601) ; v1(62.992,56.84) U11.17@65.558,56.84
  Signal Layer 1 w0.381: SPI1.4@56.896,106.299 56.896,88.938 63.627,82.207 63.627,73.085 62.484,71.942 62.484,57.348 v1(62.992,56.84)
  Solder Side w0.305: v1(56.515,55.601) 56.515,55.347 57.175,54.686 62.547,54.686 62.992,55.131 v1(62.992,56.84)
MOSI1: SPI1.5 U6.E10 U11.15 | length 66.9
  Component Side w0.305: U6.E10@56.975,55.149 57.008,55.149 57.51,55.651 v1(57.531,55.651) ; U11.15@65.558,58.872 67.456,58.872 v1(67.458,58.869)
  Signal Layer 2 w0.381: v1(57.531,55.651) 57.531,55.626 58.017,55.14 62.785,55.14 66.515,58.869 v1(67.458,58.869)
  Signal Layer 1 w0.381: SPI1.5@59.436,106.299 59.411,106.274 59.411,96.342 60.579,95.174 63.195,95.174 63.754,94.615 63.754,84.658 67.712,80.7 67.712,60.066 67.458,59.813 v1(67.458,58.869)
NetBatt1_1: Batt1.1 D7.1 | length 26.7
  Component Side w0.305: Batt1.1@32.385,67.056 35.433,67.056 37.744,69.367 37.744,81.915 37.363,82.296 v1(35.255,82.296) ; Batt1.1@32.385,82.296 v1(35.255,82.296) ; D7.1@36.957,83.881 36.837,83.881 35.255,82.299 v1(35.255,82.296)
NetC5_2: C5.2 C11.2 U11.24 | length 4.3
  Component Side w0.305: U11.24@73.554,51.128 73.554,49.285 C5.2@72.898,48.629 C11.2@74.422,48.629
NetC14_2: C14.2 U14.6 Y1.1 | length 6.5
  Component Side w0.254: 66.735,35.963 67.075,36.304 69.139,36.304 69.62,35.823 C14.2@71.884,35.823
  Component Side w0.381: U14.6@65.77,35.963 66.735,35.963
NetC15_2: C15.2 U14.5 Y1.3 | length 4.2
  Component Side w0.381: U14.5@65.77,35.313 66.884,35.313 67.572,34.625 68.309,34.625 68.403,34.531 C15.2@68.403,33.248
NetC21_2: C21.2 R31.2 U6.G5 | length 32.7
  Component Side w0.305: R31.2@30.607,40.476 C21.2@28.702,40.476 v1(32.385,44.159) ; v1(51.52,52.654) 51.975,53.11 U6.G5@51.975,53.149
  Signal Layer 2 w0.381: v1(32.385,44.159) 36.801,44.159 37.512,44.869 39.161,44.869 40.589,46.297 40.589,50.216 42.975,52.602 46.37,52.602 46.423,52.654 v1(51.52,52.654)
NetC25_2: C25.2 J3.1 U16.1 | length 12
  Component Side w0.305: v1(37.529,36.613) 37.529,34.801 J3.1@37.888,34.442 ; U16.1@41.134,35.193 41.072,35.193 40.636,35.629 v1(40.636,36.17) 40.65,36.184 41.226,36.184 43.688,38.646 C25.2@43.688,39.726
  Signal Layer 2 w0.381: v1(37.529,36.613) 37.698,36.613 38.142,36.17 v1(40.636,36.17)
NetD1_2: D1.2 R2.1 | length 7.9
  Component Side w0.305: R2.1@34.671,35.191 34.671,33.63 36.043,32.258 36.043,29.616 35.575,29.149 D1.2@35.575,28.067
NetD2_2: D2.2 R3.1 | length 9.4
  Component Side w0.305: R3.1@36.322,35.191 36.322,32.817 37.503,31.636 38.263,31.636 40.782,29.116 D2.2@40.782,28.067
NetD3_2: D3.2 TVS1.1 | length 17
  Component Side w0.305: TVS1.1@27.305,64.389 v1(28.144,65.227) ; v1(39.751,72.517) D3.2@39.751,73.66
  Signal Layer 2 w0.381: v1(28.144,65.227) 32.461,65.227 v1(39.751,72.517)
NetD4_2: D4.2 R19.1 | length 22.1
  Component Side w0.305: D4.2@64.658,28.067 v1(64.658,29.21) ; v1(76.225,37.059) 76.225,39.251 76.729,39.755 R19.1@76.729,40.474
  Signal Layer 2 w0.381: v1(64.658,29.21) 70.231,29.21 70.549,29.527 70.549,31.115 71.26,31.826 73.762,31.826 76.225,34.29 v1(76.225,37.059)
NetD5_1: D5.1 USB1.1 | length 14.1
  Component Side w0.305: v1(66.243,106.998) 66.243,106.604 D5.1@67.183,105.664 ; v1(74.955,104.75) 75.971,103.734 USB1.1@75.971,102.667
  Signal Layer 2 w0.381: v1(66.243,106.998) 67.259,106.998 67.496,107.234 72.045,107.234 74.529,104.75 v1(74.955,104.75)
NetD5_2: D5.2 L6.1 | length 1.9
  Component Side w0.305: L6.1@67.183,99.683 D5.2@67.183,101.625
NetD6_2: D6.2 R23.1 | length 15.9
  Component Side w0.305: D6.2@69.992,28.067 69.992,29.87 78.359,38.237 R23.1@78.359,40.474